# Altium PCB ServoExpanderPCB.PcbDoc
Units mil, origin at the board's own origin, x right, y up, seen from the top; angles counter-clockwise.
Board outline 1339.69 x 1580 mil, 2 copper layers (Top Layer, Bottom Layer); 16 components, 22 nets, 73 pads, 33 vias.
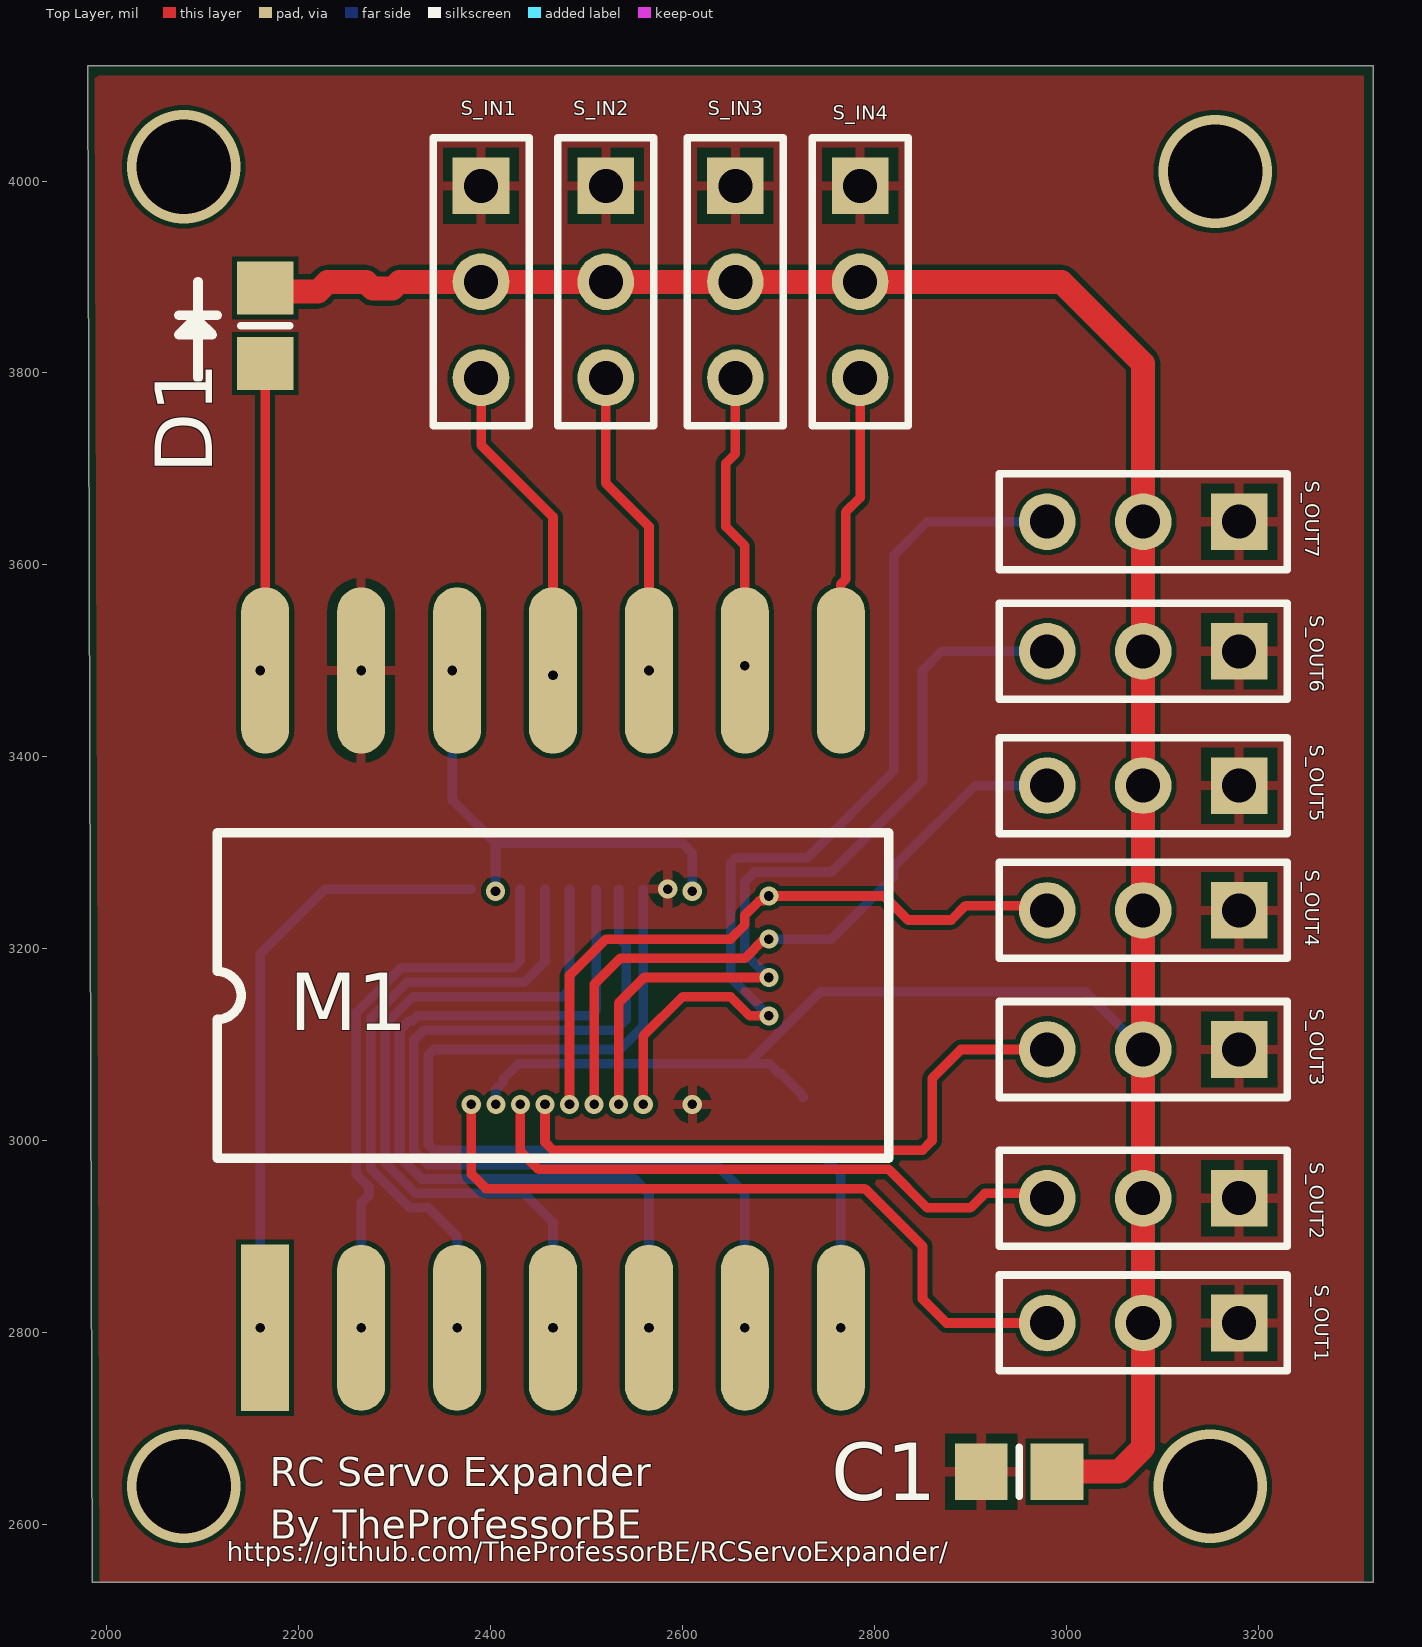
[diagram p0: Top Layer view]
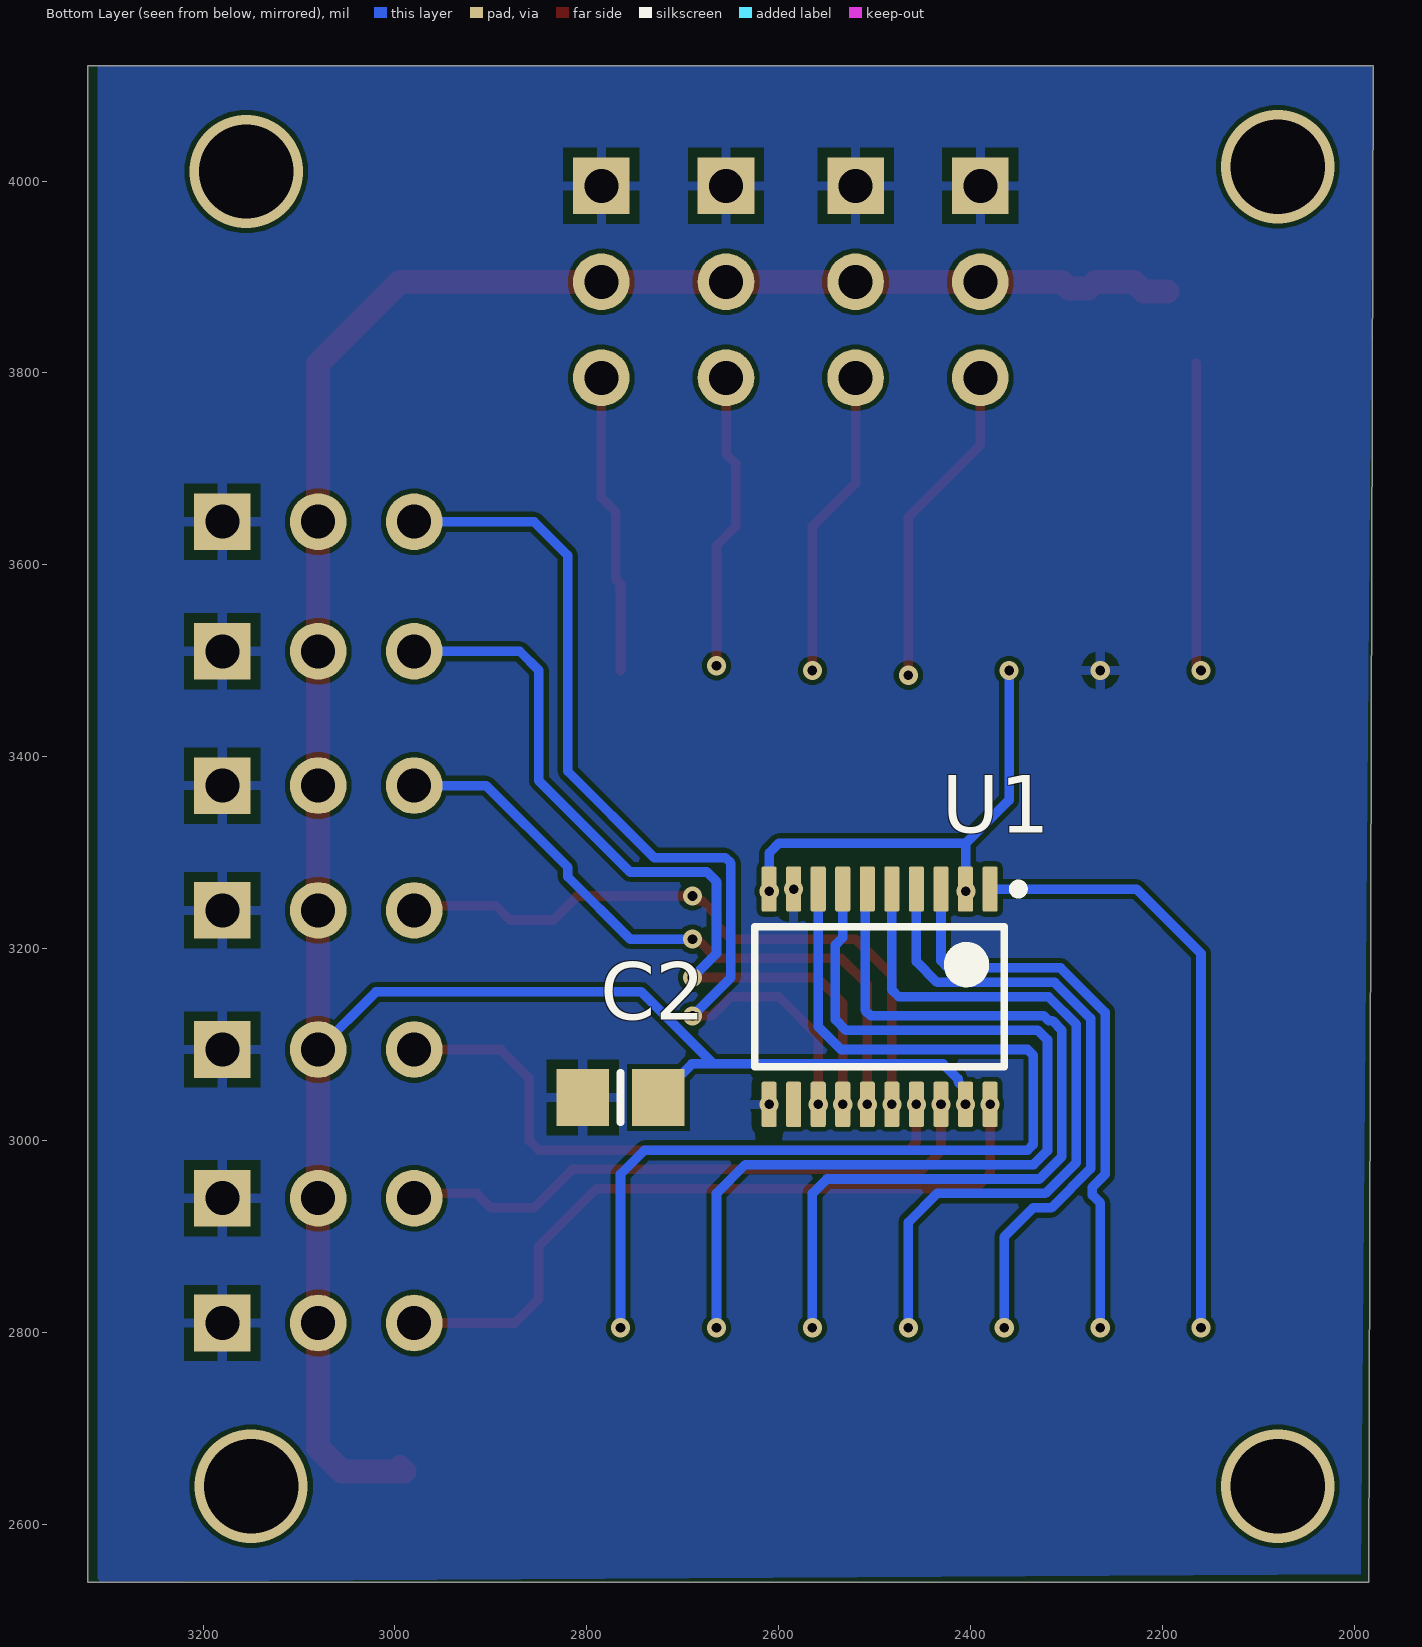
[diagram p1: Bottom Layer view, seen from below]

## Layer stack, top to bottom
Top Solder: solder mask 0.4, Solder Resist, Dk 3.5
Top Layer: signal copper 1.4
Dielectric 1: dielectric 12.6, FR-4, Dk 4.8
Bottom Layer: signal copper 1.4
Bottom Solder: solder mask 0.4, Solder Resist, Dk 3.5

## Board outline
1980.31,4120 3320,4120 3320,2540 1985,2540

## Design rules (kind name [scope] priority, off if disabled: settings)
Clearance [All] p1: gap=5 ignorepadtopadclearanceinfootprint=FALSE
PolygonConnect [All] p1: connectstyle=Relief reliefconductorwidth=10 reliefentries=4 polygonreliefangle="90 Angle" airgapwidth=10
RoutingVias [All] p1: holewidth=28 width=50 viastyle="Through Hole" minholewidth=28 minwidth=50 maxholewidth=28 maxwidth=50
SolderMaskExpansion [All] p1: expansion=4 istentingtop=FALSE
Width [All] p1: maxlimit=40 minlimit=10 preferedwidth=10
30 further rules are at their usual default settings.

## Components (designator, comment, footprint, x,y, rotation, side; value= is the part's Value field where it differs from the comment)
C1 "Cap Semi" 6-0805_M 2950.63,2655 r180 top value=1nf
C2 "Cap Semi" 6-0805_M 2765,3045 r0 bottom value=100nf
D1 "Diode" 6-0805_M 2165,3849.37 r90 top
M1 "SEED XIAO RP2040" "XIAO RP2040" 2165,2860 r90 top
S_IN1 "Header 3" HDR1X3 2390,3995 r270 top
S_IN2 "Header 3" HDR1X3 2520,3995 r270 top
S_IN3 "Header 3" HDR1X3 2655,3995 r270 top
S_IN4 "Header 3" HDR1X3 2785,3995 r270 top
S_OUT1 "Header 3" HDR1X3 3180,2810 r180 top
S_OUT2 "Header 3" HDR1X3 3180,2940 r180 top
S_OUT3 "Header 3" HDR1X3 3180,3095 r180 top
S_OUT4 "Header 3" HDR1X3 3180,3240 r180 top
S_OUT5 "Header 3" HDR1X3 3180,3370 r180 top
S_OUT6 "Header 3" HDR1X3 3180,3510 r180 top
S_OUT7 "Header 3" HDR1X3 3180,3645 r180 top
U1 "TXB0108PWR" PW0020A_L 2495,3150 r270 bottom

## Footprints (in the part's own frame and the unit in brackets; to place one, negate y for a bottom-side part, rotate by r counter-clockwise, add the part's x,y. Pads: shape width x height; smd on the part's side, far side on the other; paste and mask are expansions set on the pad)
6-0805_M [mm] "Chip Resistor, Body 2.0x1.2mm, IPC Low Density"
  rect 1.4x1.5 smd: 1(-1,0) 2(1,0)
  silkscreen extent 0,-0.65 0,0.65, body extent -1.07,-0.7 1.07,0.7, height 0.7
HDR1X3 [mm] "Connector; Header; 3 Position"
  rect 1.5x1.5 hole 0.9: 1(0,0)
  round 1.5 hole 0.9: 2(2.54,0) 3(5.08,0)
  silkscreen extent -1.27,-1.27 6.35,1.27
PW0020A_L [mm] "SOP, 20-Leads, Body 6.6x4.5mm, Pitch 0.65mm, IPC High Density"
  rrect25% 1.2x0.4 smd: 1(-2.85,2.925) 2(-2.85,2.275) 3(-2.85,1.625) 4(-2.85,0.975) 5(-2.85,0.325) 6(-2.85,-0.325) 7(-2.85,-0.975) 8(-2.85,-1.625) 9(-2.85,-2.275) 10(-2.85,-2.925) 11(2.85,-2.925) 12(2.85,-2.275) 13(2.85,-1.625) 14(2.85,-0.975) 15(2.85,-0.325) 16(2.85,0.325) 17(2.85,0.975) 18(2.85,1.625) 19(2.85,2.275) 20(2.85,2.925)
  silkscreen extent -2.97,-3.3 1.85,3.8, body extent -3.21,-3.25 3.21,3.25, height 1
"XIAO RP2040" [mil]
  oval 173.23x50 smd: 3V3(630,-200) 5V(630,0) D1(-55,-100) D2(-55,-200) D3(-55,-300) D4(-55,-400) D5(-55,-500) D6(-55,-600) D7(630,-600) D8(630,-500) D9(630,-400) D10(630,-300) GND(630,-100)
  rect 173.23x50 smd: D0(-55,0)
  silkscreen extent 122,-650 461,50

## Part data
C1 C2: "Capacitor (Semiconductor SIM Model)", LatestRevisionDate=29-May-2009, LatestRevisionNote="IPC-7351 Footprint Added.", PackageDescription="Chip Capacitor", PackageReference=C1206, Published=8-Jun-2000, Publisher="Altium Limited"
D1: "Default Diode", Code_JEDEC=DO-214-AB, LatestRevisionDate=17-Jul-2002, LatestRevisionNote="Re-released for DXP Platform.", PackageDescription="DO-214-AB/SMC; 2 C-Bend Leads; Body 7.9 x 5.9 mm, inc. leads (LxW)", PackageReference=SMC, PackageVersion=Sep-1996, Published=8-Jun-2000, Publisher="Altium Limited"
S_IN1 S_IN2 S_IN3 S_IN4 S_OUT1 S_OUT2 S_OUT3 S_OUT4 S_OUT5 S_OUT6 S_OUT7: "Header, 3-Pin", LatestRevisionDate=17-Jul-2002, LatestRevisionNote="Re-released for DXP Platform.", Publisher="Altium Limited"
U1: library part CMP-2000-07337-1, "TXB0108 8-Bit Bidirectional Voltage-Level Translator with Auto-Direction Sensing and / +/- 15-kV ESD Protection, 1.2 to 3.6 V, -40 to 85 degC, 20-Pin TSSOP (PW), Green (RoHS & no Sb/Br), Tape and Reel", Manufacturer="Texas Instruments", Operating Temperature=-40°C~85°C, Package / Case="20-TSSOP(0.173\",4.40mmWidth)", Package Description="20-Pin Small Outline Package Integrated Circuit, Body 6.5 x 4.4 mm, Pitch 0.65 mm", Package Reference=PW20, Package Version="4040064-5/G, 02/2011", Standard Package=1, Supplier Device Package=20-TSSOP, Voltage - Supply=1.2V~3.6V,1.65V~5.5V, Category=IntegratedCircuits(ICs), Data Rate=100Mbps, Datasheet URL=http://www.ti.com/general/docs/lit/getliterature.tsp?genericPartNumber=TXB0108&fileType=pdf, Datasheet Version="Rev. F, 12/2014", Differential - Input=Output:No/No, Dynamic Catalog=TXBSeries, Family=Logic-Translators, Input Type=Logic, Logic Function=Translator,Bidirectional, Manufacturer URL=http://www.ti.com/, Mounting Technology=SurfaceMount, Number of Bits=8, Number of Channels=8, Number of Outputs/Channel=1, Other Names=296-21527-6, Output Type=Logic, Package URL=http://www.ti.com/litv/pdf/mpds362, Packaging=Digi-Reel®, Product Training Modules=VoltageLevelTranslation, Propagation Delay (Max)=4ns, Series=-

## Via types
v1: diameter 20, hole 10, Top Layer to Bottom Layer, 29 vias
v2: diameter 118.11, hole 98.43, Top Layer to Bottom Layer, 4 vias

## Nets (pads, with @x,y where several pads share a name; then routed paths per layer and width w, separated by ;. In a path a pad name is that pad's centre, name@x,y a point inside that pad or via, vN(x,y) a via of type N, cw(c..) or ccw(c..) an arc to the next point about the centre after c; other vN are vias at no path point)
3V3: M1.3V3 U1.2 U1.10 | length 497.8
  Bottom Layer w10: v1(2360,3490) 2360,3355 2405,3310 ; v1(2405,3260) 2405,3310 ; v1(2610,3260) 2610,3300 2600,3310 2405,3310
5V: C1.1 C2.1 D1.2 S_IN1.2 S_IN2.2 S_IN3.2 S_IN4.2 S_OUT1.2 S_OUT2.2 S_OUT3.2 S_OUT4.2 S_OUT5.2 S_OUT6.2 S_OUT7.2 U1.19 | length 2999.7
  Top Layer w25: 2195,3885 2220,3885 2230,3895 2270,3895 2277.14,3887.86 2297.86,3887.86 2305,3895 S_IN1.2 S_IN2.2 S_IN3.2 S_IN4.2 2995,3895 3080,3810 S_OUT7.2 S_OUT6.2 S_OUT5.2 S_OUT4.2 S_OUT3.2 S_OUT2.2 S_OUT1.2 3080,2680 3055,2655 C1.1 C1.1@2995,2660
  Bottom Layer w10: v1(2405.43,3037.8) 2405.43,3053.54 2413.15,3061.26 2413.15,3064.41 2428.74,3080 2668.28,3080 ; C2.1 2725.63,3046.97 2703.07,3069.53 2701.1,3069.53 2690.63,3080 2668.28,3080 ; S_OUT3.2 3020,3155 2743.28,3155 2668.28,3080
5VUSB: D1.1 M1.5V | length 322.1
  Top Layer w10: v1(2160,3490) 2165,3495 D1.1
GND: C1.2 C2.2 M1.GND S_IN1.1 S_IN2.1 S_IN3.1 S_IN4.1 S_OUT1.1 S_OUT2.1 S_OUT3.1 S_OUT4.1 S_OUT5.1 S_OUT6.1 S_OUT7.1 U1.9 U1.11
  other v1: 2610.16,3037.8 2584.57,3262.2 2265,3490
ServoIn1: M1.D10 S_IN1.3 | length 341.1
  Top Layer w10: S_IN1.3 2390,3725 2465,3650 M1.D10 v1(2465,3485)
ServoIn2: M1.D9 S_IN2.3 | length 323.6
  Top Layer w10: S_IN2.3 2520,3685 2565,3640 v1(2565,3490)
ServoIn3: M1.D8 S_IN3.3 | length 312.4
  Top Layer w10: S_IN3.3 2655,3715.86 2645,3705.86 2645,3640 2665,3620 v1(2665,3495)
ServoIn4: M1.D7 S_IN4.3 | length 313.3
  Top Layer w10: M1.D7 2765,3580 2770,3585 2770,3655 2785,3670 S_IN4.3
ServoOut1: M1.D0 U1.1 | length 637.7
  Bottom Layer w10: v1(2160,2805) 2160,3195 2227.2,3262.2 U1.1
ServoOut2: M1.D1 U1.3 | length 605.6
  Bottom Layer w10: v1(2265,2805) 2265,2935 2273.25,2943.25 2273.25,2951.54 2260,2964.79 2260,3133.64 2306.36,3180 2423.54,3180 2431.02,3187.49 U1.3
ServoOut3: M1.D2 U1.4 | length 652.6
  Bottom Layer w10: v1(2365,2805) 2365,2900 2335,2930 2316.01,2930 2275,2971.01 2275,3127.43 2312.57,3165 2435,3165 2456.61,3186.61 U1.4
ServoOut4: M1.D3 U1.5 | length 766.9
  Bottom Layer w10: v1(2465,2805) 2465,2915 2435,2945 2322.22,2945 2290,2977.22 2290,3121.21 2318.79,3150 2475,3150 2482.2,3157.2 U1.5
ServoOut5: M1.D4 U1.6 | length 887.5
  Bottom Layer w10: U1.6@2510,3262.2 2510,3135.86 2504.14,3130 2323.79,3130 2318.79,3125 2315,3125 2305,3115 2305,2983.43 2328.43,2960 2550,2960 2565,2945 v1(2565,2805)
ServoOut6: M1.D5 U1.7 | length 988
  Bottom Layer w10: U1.7 2533.39,3211.61 2541.1,3203.9 2541.1,3126.1 2530,3115 2330,3115 2320,3105 2320,2989.64 2334.64,2975 2635,2975 2665,2945 v1(2665,2805)
ServoOut7: M1.D6 U1.8 | length 1075.6
  Bottom Layer w10: U1.8 2558.98,3118.98 2535,3095 2340.86,3095 2335,3089.14 2335,2995.86 2340.86,2990 2740,2990 2765,2965 v1(2765,2805)
ServoOutShift1: S_OUT1.3 U1.20 | length 769.3
  Top Layer w10: v1(2379.84,3037.8) 2379.84,2965.16 2395,2950 2790,2950 2850,2890 2850,2835 2875,2810 S_OUT1.3
ServoOutShift2: S_OUT2.3 U1.18 | length 630.5
  Top Layer w10: v1(2431.02,3037.8) 2431.02,2988.98 2450,2970 2815,2970 2855,2930 2900,2930 2915,2945 2975,2945 S_OUT2.3
ServoOutShift3: S_OUT3.3 U1.17 | length 647.8
  Top Layer w10: v1(2456.61,3037.8) 2456.61,2998.39 2465,2990 2850,2990 2860,3000 2860,3065 2890,3095 S_OUT3.3
ServoOutShift4: S_OUT4.3 U1.16 | length 683.9
  Top Layer w10: v1(2482.2,3037.8) 2482.2,3172.2 2520,3210 2650,3210 2665,3225 2665,3235 2680,3250 v1@2685,3250 ; v1(2690,3255) 2810,3255 2835,3230 2880,3230 2895,3245 2975,3245 S_OUT4.3
ServoOutShift5: S_OUT5.3 U1.15 | length 688.9
  Top Layer w10: v1(2507.8,3037.8) 2507.8,3162.8 2535,3190 2665,3190 2685,3210 v1(2690,3210)
  Bottom Layer w10: v1(2690,3210) 2755,3210 2820,3275 2820,3285 2905,3370 S_OUT5.3
ServoOutShift6: S_OUT6.3 U1.14 | length 865.4
  Top Layer w10: v1(2533.39,3037.8) 2533.39,3143.39 2560,3170 v1(2690,3170)
  Bottom Layer w10: v1(2690,3170) 2665,3195 2665,3270 2675,3280 2755,3280 2850,3375 2850,3490 2870,3510 S_OUT6.3
ServoOutShift7: S_OUT7.3 U1.13 | length 1012.4
  Top Layer w10: v1(2558.98,3037.8) 2558.98,3108.98 2600,3150 2650,3150 2670,3130 v1(2690,3130)
  Bottom Layer w10: v1(2690,3130) 2650,3170 2650,3289.14 2655.86,3295 2730,3295 2820,3385 2820,3610 2855,3645 S_OUT7.3
pads on no net: U1.12
copper on no net:
  other v2: 2080,2640 3150,2640 3155,4010 2080,4015

## Polygon pours and split planes (outlines as drawn)
GND on Top Layer "GND_L01_P000" (solid, pour order 0): 1987.43,4110 3310,4110 3310,2540 1992.7,2540
GND on Bottom Layer "GND_L02_P001" (solid, pour order 1): 1980.31,4120 3310,4120 3310,2540.06 1993.39,2548.27

## Silkscreen, mask and mechanical layers (free items; w line width, h text height)
Top Overlay:
  lines w10: 2075,3860 2105,3860 2115,3860 ; 2090,3845 2090,3850 2095,3855 2110,3840 2075,3840 2095,3860 ; 2095,3795 2095,3895
  text "RC Servo Expander" at 2170,2640 h30
  text "By TheProfessorBE" at 2170,2585 h30
  text "https://github.com/TheProfessorBE/RCServoExpander/" at 2125,2561.66 h20
Mechanical 1:
  lines w10: 1985,2600 1985,4065 2030,4110 3220,4110 3260,4110 3315,4055 3315,2595 3260,2540 3225,2540 2045,2540 1985,2600